# Altium PCB mini.PcbDoc
Units mm, origin at the board's own origin, x right, y up, seen from the top; angles counter-clockwise.
Board outline 46.48 x 38.61 mm, 2 copper layers (Top Layer, Bottom Layer); 40 components, 46 nets, 179 pads, 24 vias.
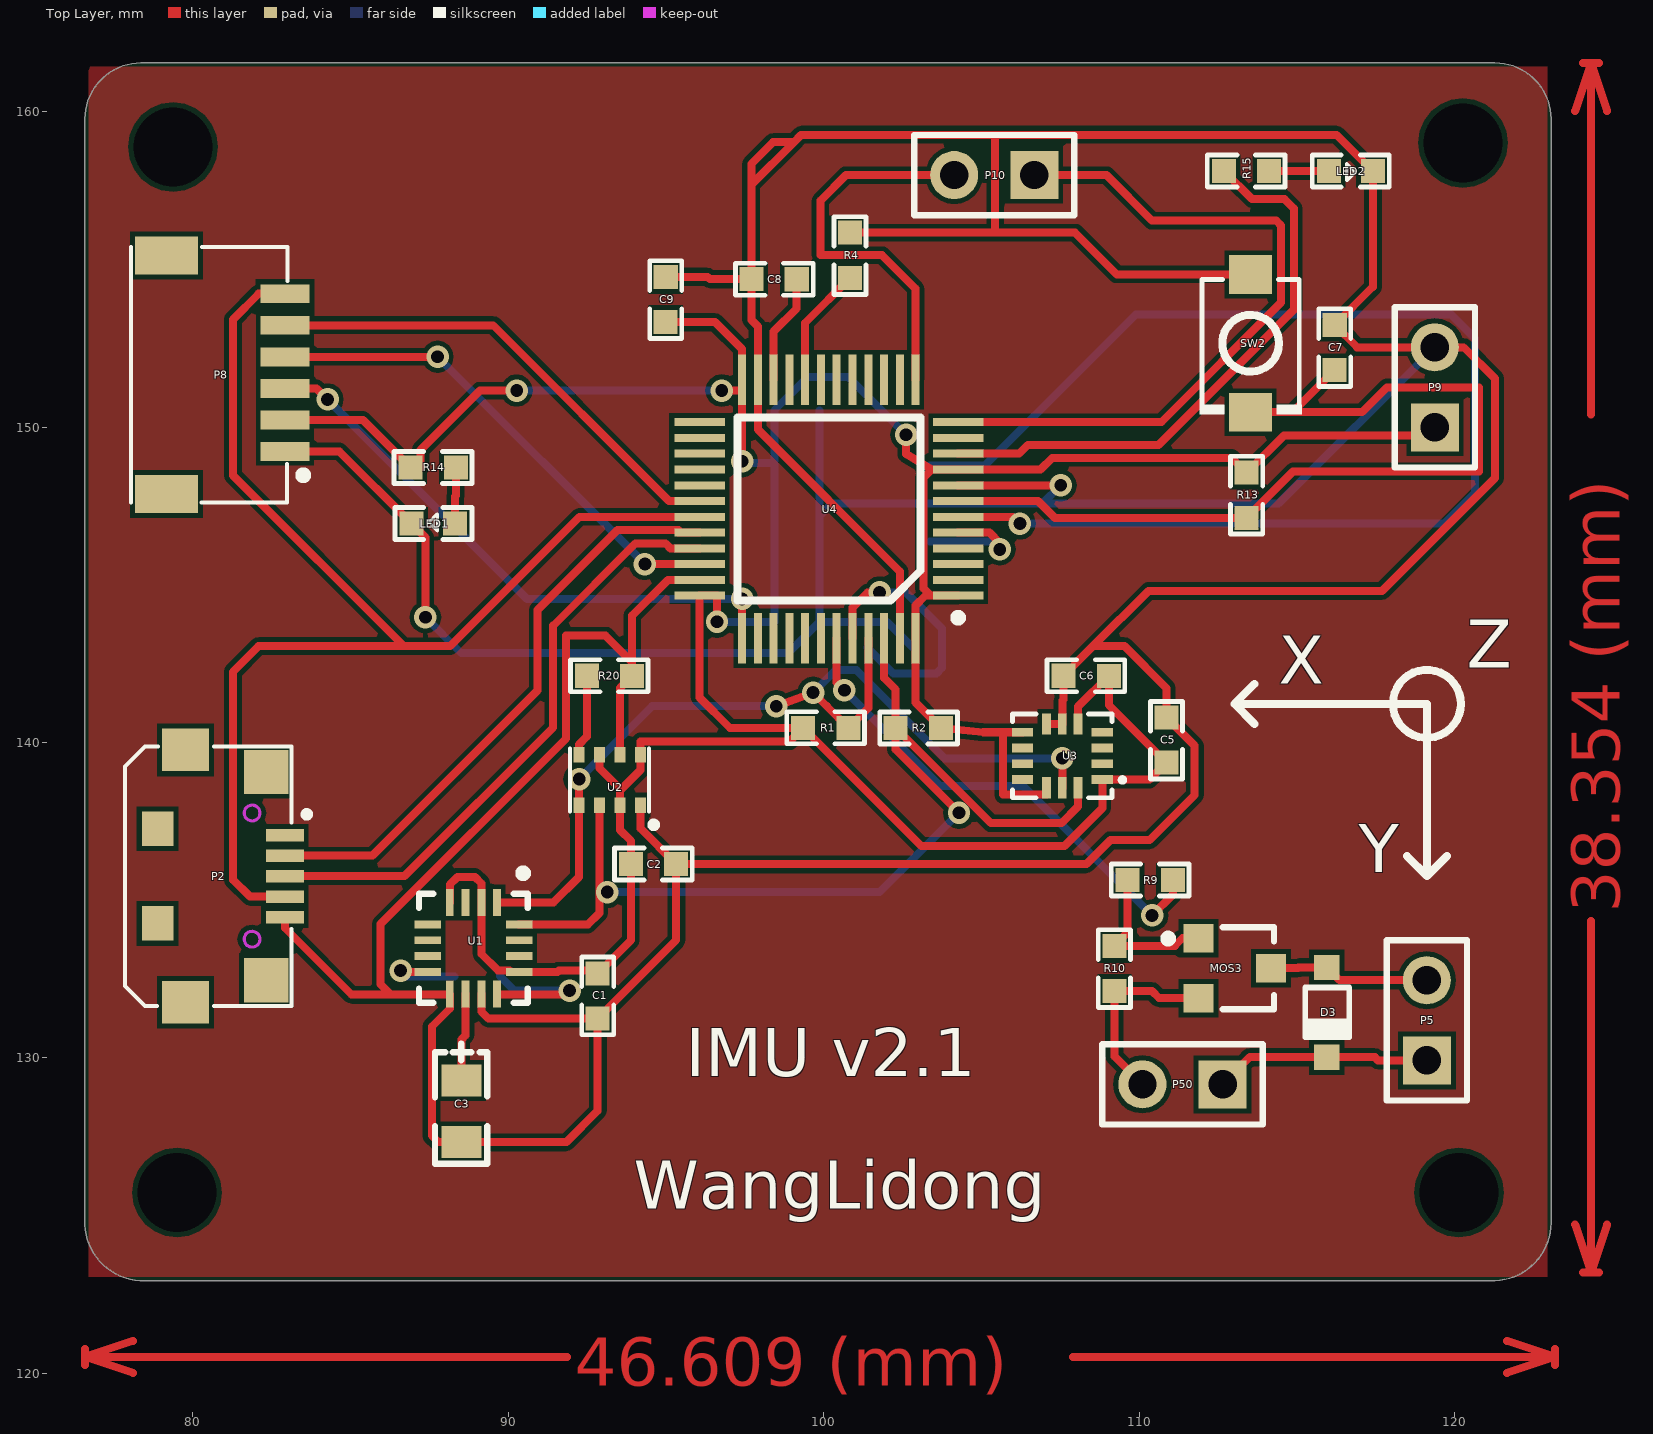
[diagram p0: Top Layer view]
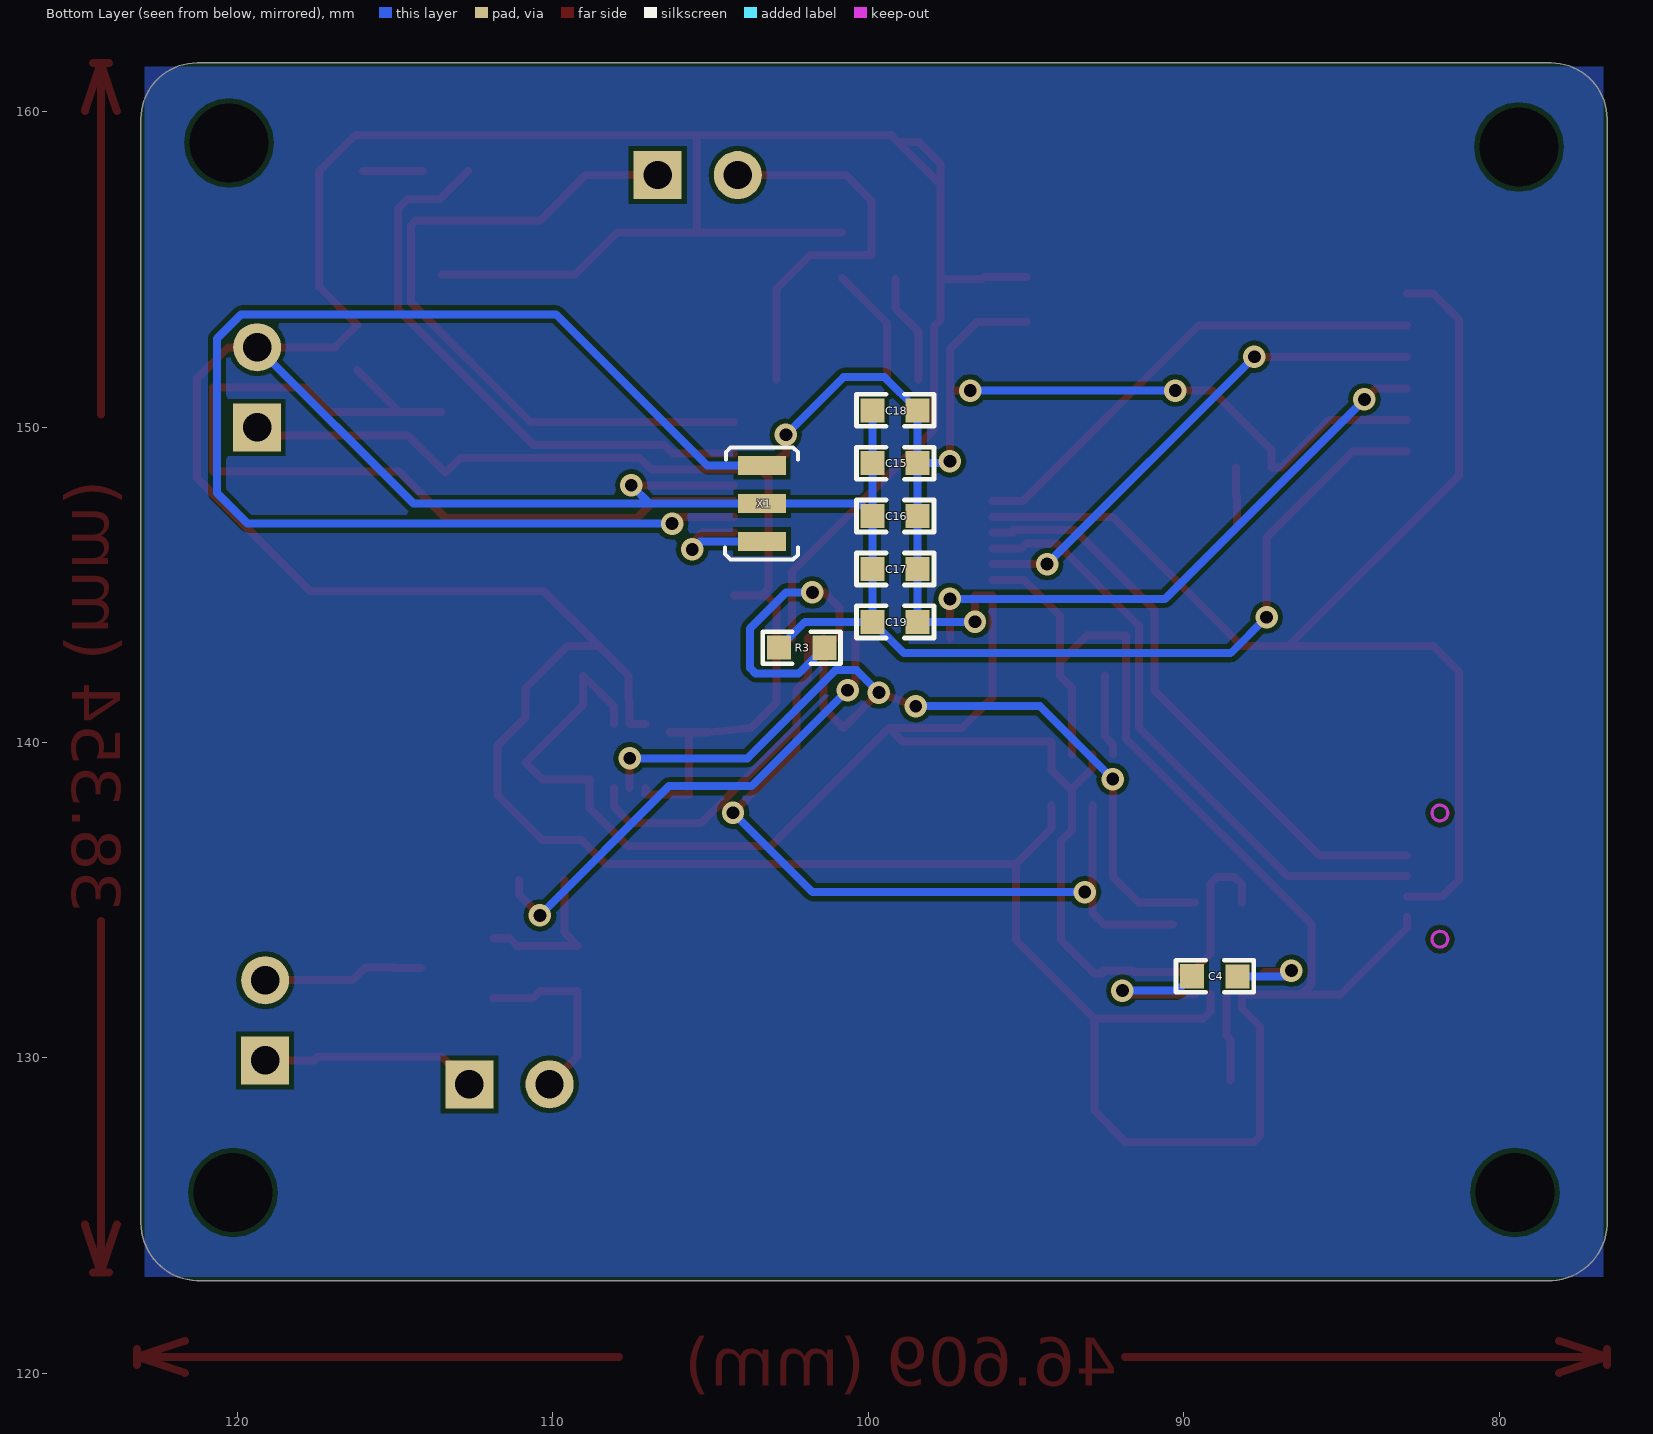
[diagram p1: Bottom Layer view, seen from below]

## Layer stack, top to bottom
Top Solder: solder mask 0.0102, Solder Resist, Dk 3.5
Top Layer: signal copper 0.0356
Dielectric 1: dielectric 0.32, FR-4, Dk 4.8
Bottom Layer: signal copper 0.0356
Bottom Solder: solder mask 0.0102, Solder Resist, Dk 3.5

## Board outline
76.581,124.714 76.581,159.766 cw(c78.359,159.766) 78.359,161.544 cw(c78.359,161.417) 78.36,161.544 121.285,161.544 cw(c121.285,159.766) 123.063,159.766 cw(c122.936,159.766) 123.063,159.765 123.063,124.843 cw(c121.221,124.778) 123.065,124.778 cw(c121.221,124.778) 121.29,122.936 cw(c121.285,123.063) 121.285,122.936 78.488,122.936 cw(c78.423,124.777) 76.581,124.709 cw(c76.708,124.714)

## Design rules (kind name [scope] priority, off if disabled: settings)
Clearance [All] p1: gap=0.152 ignorepadtopadclearanceinfootprint=FALSE except(0: Arc-Hole Track-Hole SMDPad-Hole THPad-Hole Via-Hole Fill-Hole Poly-Hole Region-Hole Text-Hole)
HoleSize [All] p1: absolutevalues=TRUE maxlimit=6.3 minlimit=0.2 maxpercent=80.000 minpercent=20.000
PolygonConnect [All] p1: connectstyle=Relief reliefconductorwidth=0.254 reliefentries=4 polygonreliefangle="90 Angle" airgapwidth=0.254
RoutingVias [All] p1: holewidth=0.406 width=0.711 viastyle="Through Hole" minholewidth=0.305 minwidth=0.635 maxholewidth=0.61 maxwidth=1.016
SolderMaskExpansion [All] p1: expansion=0.152
Width power [All] p1: maxlimit=2.54 minlimit=0.254 preferedwidth=0.254
Width [All] p2: maxlimit=2.54 minlimit=0.254 preferedwidth=0.254
29 further rules are at their usual default settings.

## Components (designator, comment, footprint, x,y, rotation, side; value= is the part's Value field where it differs from the comment)
C1 "0.1UF" 0603P 92.837,131.953 r90 top
C2 "10uF" 0603P 94.615,136.144 r180 top
C3 "4.7UF" "C0805 钽电容" 88.519,129.286 r270 top
C4 "0.22UF" 0603P 89.027,132.588 r180 bottom
C5 "100nF" 0603P 110.871,140.081 r270 top
C6 "100nF" 0603P 108.331,142.113 r180 top
C7 "104" 0603P 116.205,152.527 r270 top
C8 "10uF" 0603P 98.425,154.686 r0 top
C9 "104" 0603P 94.996,154.051 r270 top
C15 "104" 0603P 99.162,148.854 r180 bottom
C16 "104" 0603P 99.162,147.178 r180 bottom
C17 "104" 0603P 99.162,145.501 r180 bottom
C18 "103" 0603P 99.162,150.531 r180 bottom
C19 "10uF" 0603P 99.162,143.825 r180 bottom
D3 "BAT54WS" SOD-323 115.951,131.445 r90 top
LED1 "BLUE" 0603 87.63,146.939 r180 top
LED2 "BLUE" 0603 116.713,158.115 r0 top
MOS3 "SI2302" SO-G3/C2.5 113.03,132.842 r270 top
P2 "MICRO-USB" MICRO_USB5P_SOP 82.931,135.763 r90 top
P5 "Header 2" HDR1X2 119.126,129.921 r90 top
P8 "HEAD6" SH1.0-6P 82.931,149.225 r90 top
P9 "Header 2" HDR1X2 119.38,149.987 r90 top
P10 "Header 2" HDR1X2 106.68,157.988 r180 top
P50 "Header 2" HDR1X2 112.649,129.159 r180 top
R1 "2.2K" 0603P 100.076,140.462 r180 top
R2 "2.2K" 0603P 102.997,140.462 r0 top
R3 "10K" 0603P 102.108,143.002 r0 bottom
R4 "100K" 0603P 100.838,155.448 r270 top
R9 "100R" 0603P 110.363,135.636 r180 top
R10 "10K" 0603P 109.22,132.842 r270 top
R13 "100K" 0603P 113.411,147.828 r90 top
R14 "3.5k" 0603P 87.63,148.717 r180 top
R15 "2k" 0603P 113.411,158.115 r180 top
R20 "100K" 0603P 93.218,142.113 r180 top
SW2 "SW3_4" SW3_4 113.538,152.654 r270 top
U1 "HMC3883L" QFN-16PIN 88.9,133.477 r270 top
U2 "BMP280" LGA-8 93.218,138.811 r270 top
U3 "QMI8658" 14pinLGA 107.569,139.573 r180 top
U4 "STM32F103C8" mTQFP48 104.267,144.653 r180 top
X1 "8MHz" XTAL3215 103.378,147.574 r90 bottom

## Footprints (in the part's own frame and the unit in brackets; to place one, negate y for a bottom-side part, rotate by r counter-clockwise, add the part's x,y. Pads: shape width x height; smd on the part's side, far side on the other; paste and mask are expansions set on the pad)
14pinLGA [mm]
  rect 0.675x0.28 smd paste+0 mask+0.051: 1(-1.262,0.75) 2(-1.262,0.25) 3(-1.262,-0.25) 4(-1.262,-0.75) 8(1.262,-0.75) 9(1.262,-0.25) 10(1.262,0.25) 11(1.262,0.75)
  rect 0.28x0.675 smd paste+0 mask+0.051: 5(-0.5,-1.012) 6(0,-1.012) 7(0.5,-1.012) 12(0.5,1.012) 13(0,1.012) 14(-0.5,1.012)
  silkscreen extent -1.98,-1.33 1.58,1.33
0603 [mil]
  rect 30x30 smd: 1(-27,0) 2(27.5,-0.06)
  silkscreen extent -48,-20 48,20
0603P [mil]
  rect 30x30 smd: 1(-28,0) 2(28.5,-0.06)
  silkscreen extent -48,-20 49,20
"C0805 钽电容" [mil]
  rect 40x50 smd: 1(0,-0.06) 2(77,-0.06)
  silkscreen extent -46,-33 104,32
HDR1X2 [mil]
  rect 60x60 hole 35.43: 1(0,0)
  round 60 hole 35.43: 2(100,0)
  silkscreen extent -50,-50 150,50
LGA-8 [mm]
  rect 0.5x0.35 smd: 1(0.8,0.975) 2(0.8,0.325) 3(0.8,-0.325) 4(0.8,-0.975) 5(-0.8,-0.975) 6(-0.8,-0.325) 7(-0.8,0.325) 8(-0.8,0.975)
  silkscreen extent -1,-1.25 1.52,1.5
MICRO_USB5P_SOP [mm]
  rect 1.35x1.5 smd: 0(-4,3.16) 0(4,3.16)
  rect 1.4x1.4 smd: 0(-3.3,0.6) 0(3.3,0.6)
  rect 1.1x1 smd: 0(-1.5,4.046) 0(1.5,4.046)
  rect 0.4x1.2 smd: 1(1.3,0) 2(0.65,0) 3(0,0) 4(-0.65,0) 5(-1.3,0)
  Keep-Out Layer circle w0.1: c-2,1.05 r0.25
  Keep-Out Layer circle w0.1: c2,1.05 r0.25
  silkscreen extent -4.11,-0.79 4.11,5.08
mTQFP48 [mm]
  rect 1.6x0.254 smd: 1(0,0) 2(0,-0.5) 3(0,-1) 4(0,-1.5) 5(0,-2) 6(0,-2.5) 7(0,-3) 8(0,-3.5) 9(0,-4) 10(0,-4.5) 11(0,-5) 12(0,-5.5) 25(8.2,-5.5) 26(8.2,-5) 27(8.2,-4.5) 28(8.2,-4) 29(8.2,-3.5) 30(8.2,-3) 31(8.2,-2.5) 32(8.2,-2) 33(8.2,-1.5) 34(8.2,-1) 35(8.2,-0.5) 36(8.2,0)
  rect 0.254x1.6 smd: 13(1.35,-6.85) 14(1.85,-6.85) 15(2.35,-6.85) 16(2.85,-6.85) 17(3.35,-6.85) 18(3.85,-6.85) 19(4.35,-6.85) 20(4.85,-6.85) 21(5.35,-6.85) 22(5.85,-6.85) 23(6.35,-6.85) 24(6.85,-6.85) 37(6.85,1.35) 38(6.35,1.35) 39(5.85,1.35) 40(5.35,1.35) 41(4.85,1.35) 42(4.35,1.35) 43(3.85,1.35) 44(3.35,1.35) 45(2.85,1.35) 46(2.35,1.35) 47(1.85,1.35) 48(1.35,1.35)
  silkscreen extent -0.12,-5.65 7,0.82
QFN-16PIN [mm] "QFN, 16-Leads, Body 3.00x3.00mm, Pitch 0.50mm, IPC Medium Density"
  rect 0.85x0.25 smd: 1(-1.45,0.75) 2(-1.45,0.25) 3(-1.45,-0.25) 4(-1.45,-0.75) 9(1.45,-0.75) 10(1.45,-0.25) 11(1.45,0.25) 12(1.45,0.75)
  rect 0.25x0.85 smd: 5(-0.75,-1.45) 6(-0.25,-1.45) 7(0.25,-1.45) 8(0.75,-1.45) 13(0.75,1.45) 14(0.25,1.45) 15(-0.25,1.45) 16(-0.75,1.45)
  silkscreen extent -2.5,-1.73 1.73,1.73, body extent -1.58,-1.58 1.58,1.58, height 1
SH1.0-6P [mm]
  rect 0.6x1.55 smd: 1(0,0) 2(1,0) 3(2,0) 4(3,0) 5(4,0) 6(5,0)
  rect 1.2x2 smd: A(-1.346,3.759) B(6.21,3.759)
  silkscreen extent -1.63,-0.7 6.48,4.89
SO-G3/C2.5 [mm]
  rect 0.9x0.95 smd: 1(-0.95,-1.148) 2(0.95,-1.148) 3(0,1.148)
  silkscreen extent -1.3,-2.23 1.3,1.25
SOD-323 [mm]
  rect 0.8x0.8 smd: 1(1.422,0) 2(-1.422,0)
  silkscreen extent -0.79,-0.74 0.79,0.69
SW3_4 [mm]
  rect 1.23x1.36 smd paste+0 mask+0.051: 1(-2.185,0) 2(2.185,0)
  silkscreen extent -2.03,-1.62 2.25,1.62
XTAL3215 [mm]
  rect 0.6x1.524 smd: 1(-1.2,0) 2(0,0) 3(1.2,0)
  silkscreen extent -1.78,-1.14 1.78,1.17

## Part data
C1 C2 C4 C5 C6 C7 C8 C9 C15 C16 C17 C18 C19: library part C
C3: library part CAP
D3: library part BAT54, "单肖特基二极管"
LED1 LED2: library part LED
MOS3: library part MOS-N, "AP2306"
P2: library part USB5
P5 P9 P10 P50: "Header, 2-Pin"
R1 R2 R3 R4 R9 R10 R13 R14 R15 R20: library part R
SW2: library part SW_3_4
U1: library part HMC5883L
U4: library part STM32F103C6
X1: library part XTAL-3215

## Free pads (board coordinates)
  round 1.524 hole 2.5: 0(79.375,158.877) 0(79.502,125.73) 0(120.142,125.73) 0(120.269,159.004)

## Via types
v1: diameter 0.711, hole 0.406, Top Layer to Bottom Layer, 24 vias

## Nets (pads, with @x,y where several pads share a name; then routed paths per layer and width w, separated by ;. In a path a pad name is that pad's centre, name@x,y a point inside that pad or via, vN(x,y) a via of type N, cw(c..) or ccw(c..) an arc to the next point about the centre after c; other vN are vias at no path point)
DEV_SCK: U4.41
DEV_SDA: U4.40
GND: C1.1 C2.1 C3.2 C5.1 C6.2 C7.1 C8.1 C9.1 C15.1 C16.1 C17.1 C18.1 C19.1 LED1.2 LED2.2 P2.5 P8.1 P9.2 R3.2 R4.1 R20.1 SW2.1 U1.9 U1.11 U2.1 U2.7 U3.6 U3.7 U4.8 U4.23 U4.35 U4.47 X1.2 | length 228.5
  Top Layer w0.254: P2.5 82.931,134.112 85.039,132.004 86.284,132.004 ; P8.1 84.647,149.225 LED1.2 87.376,146.496 v1(87.376,143.967) ; U1.9 U1.9@88.15,132.004 ; U1.11 89.15,131.47 89.379,131.242 C1.1 ; U2.7 93.543,141.727 R20.1 93.929,142.545 ; U2.1 94.193,137.277 C2.1 ; C9.1 96.317,154.762 96.393,154.686 C8.1 ; U4.35 95.064,145.153 93.929,144.018 93.929,142.545 ; R4.1 107.975,156.159 109.296,154.839 SW2.1 ; U4.47 102.417,145.418 97.917,149.918 U4.23 97.917,153.187 97.714,153.391 C8.1 ; U4.8 v1(107.518,148.153) ; 105.435,156.159 105.435,159.258 ; U3.7 U3.6 107.569,141.326 107.607,141.364 C6.2 108.545,143.053 ; 86.284,132.004 85.954,132.334 85.954,134.239 91.834,140.119 91.834,143.383 93.091,143.383 93.929,142.545 ; 86.284,132.004 U1.9@88.15,132.004 ; U1.9@88.15,132.004 88.15,131.559 87.579,130.988 87.579,127.533 87.782,127.33 C3.2 91.846,127.33 92.837,128.321 C1.1 ; C1.1 95.326,133.731 C2.1 ; C2.1 108.331,136.144 109.093,136.906 110.338,136.906 111.76,138.328 111.76,139.903 C5.1 110.871,141.718 109.536,143.053 108.545,143.053 ; C8.1 97.714,157.683 ; 97.714,157.683 99.06,159.029 ; 97.714,157.683 97.714,158.344 98.4,159.029 99.06,159.029 ; 99.06,159.029 99.289,159.258 116.267,159.258 LED2.2 117.411,154.445 C7.1 116.916,152.527 P9.2 120.294,152.527 121.285,151.536 121.285,148.387 117.704,144.805 110.298,144.805 108.545,143.053
  Bottom Layer w0.254: v1(87.376,143.967) 88.514,142.829 98.877,142.829 C19.1 ; C18.1 C15.1 C16.1 ; R3.2 102.011,143.825 C19.1 ; v1(107.518,148.153) 106.939,147.574 ; P9.2 114.427,147.574 106.939,147.574 ; C19.1 C17.1 C16.1 ; C16.1 100.269,147.574 X1.2 106.939,147.574
IMU_SCL: R1.1 U1.1 U2.4 U3.13 U4.45 | length 29.5
  Top Layer w0.254: U1.1 89.65,134.925 91.43,134.925 92.243,135.738 U2.4 92.243,138.827 v1(92.253,138.836) ; v1(98.501,141.148) v1(99.67,141.58) 100.101,141.148 R1.1 101.417,141.092 U4.45 ; U3.13 v1(107.569,139.497)
  Bottom Layer w0.254: v1(92.253,138.836) 94.564,141.148 v1(98.501,141.148) ; v1(99.67,141.58) 100.381,142.291 101.041,142.291 103.835,139.497 v1(107.569,139.497)
IMU_SDA: R2.1 U1.16 U2.3 U3.14 U4.46 | length 33
  Top Layer w0.254: U1.16 92.525,134.227 92.893,134.595 v1@92.893,135.504 ; U2.3 v1@92.893,135.504 ; v1(93.142,135.255) v1@92.893,135.504 ; U4.46 101.917,142.05 102.286,141.681 R2.1 ; v1(104.292,137.77) 102.286,139.776 R2.1 ; U3.14 108.069,137.965 107.544,137.439 105.308,137.439 R2.1
  Bottom Layer w0.254: v1(93.142,135.255) 101.778,135.255 v1(104.292,137.77)
LED_status: R15.2 U4.10 | length 18.5
  Top Layer w0.254: U4.10 106.199,149.153 106.474,149.428 110.617,149.428 114.91,153.721 114.91,156.921 114.605,157.226 113.578,157.226 R15.2
MOTOR1: R9.1 U4.43 | length 15.8
  Top Layer w0.254: U4.43 100.417,141.899 v1(100.66,141.656) ; v1(110.414,134.518) 111.074,135.179 R9.1
  Bottom Layer w0.254: v1(100.66,141.656) 103.701,138.615 106.318,138.615 v1(110.414,134.518)
MOTOR2: U4.42
MOTOR3: U4.21
MOTOR4: U4.11
NetC3_1: C3.1 U1.10 | length 2.8
  Top Layer w0.254: C3.1 88.517,130.581 88.65,130.714 U1.10
NetC4_1: C4.1 U1.12 | length 4.8
  Top Layer w0.254: U1.12 89.65,132.004 91.821,132.004 v1(91.948,132.131)
  Bottom Layer w0.254: C4.1 90.195,132.131 v1(91.948,132.131)
NetC4_2: C4.2 U1.8 | length 2.7
  Top Layer w0.254: v1(86.589,132.766) 86.627,132.727 U1.8
  Bottom Layer w0.254: v1(86.589,132.766) 86.768,132.586 C4.2
NetC7_2: C7.2 R13.1 SW2.2 U4.7 | length 29.5
  Top Layer w0.254: U4.7 106.798,147.653 107.334,147.117 R13.1 114.884,148.59 120.777,148.59 120.777,151.257 117.856,151.257 117.068,150.469 114.869,150.469 ; SW2.2 114.869,150.469 ; C7.2 114.869,150.469
NetC8_2: C8.2 U4.22 | length 3.5
  Top Layer w0.254: U4.22 98.417,153.027 99.149,153.759 C8.2
NetD3_1: D3.1 MOS3.3 P5.2 | length 5.1
  Top Layer w0.254: MOS3.3 115.037,132.842 115.062,132.867 D3.1 116.357,132.461 P5.2
NetD3_2: D3.2 P5.1 P50.1 | length 6.9
  Top Layer w0.254: P50.1 113.513,130.023 D3.2 117.475,130.023 117.577,129.921 P5.1
NetLED1_1: LED1.1 R14.1 | length 1.8
  Top Layer w0.254: LED1.1 88.316,147.803 88.341,147.828 R14.1
NetLED2_1: LED2.1 R15.1 | length 1.9
  Top Layer w0.254: R15.1 LED2.1
NetMOS3_1: MOS3.1 R9.2 R10.1 | length 5
  Top Layer w0.254: R9.2 109.639,133.972 R10.1 111.134,133.553 111.373,133.792 MOS3.1
NetMOS3_2: MOS3.2 P50.2 R10.2 | length 6.1
  Top Layer w0.254: P50.2 109.218,130.05 R10.2 110.414,132.118 110.64,131.892 MOS3.2
NetP2_2: P2.2 U4.32 | length 19
  Top Layer w0.254: P2.2 85.7,136.413 90.932,141.645 90.932,144.196 93.467,146.731 95.394,146.731 95.394,146.653 U4.32
NetP2_3: P2.3 U4.33 | length 19.5
  Top Layer w0.254: P2.3 86.716,135.763 91.427,140.475 91.427,143.701 94.031,146.304 94.996,146.304 95.147,146.153 U4.33
NetR3_1: R3.1 U4.44 | length 8.5
  Top Layer w0.254: U4.44 100.917,144.272 101.4,144.755 v1(101.778,144.755)
  Bottom Layer w0.254: R3.1 102.21,142.189 103.581,142.189 103.759,142.367 103.759,143.612 102.616,144.755 v1(101.778,144.755)
NetR4_2: R4.2 U4.20 | length 3.8
  Top Layer w0.254: U4.20 99.417,153.305 R4.2
NetR20_2: R20.2 U2.5 | length 2.6
  Top Layer w0.254: U2.5 92.243,139.933 92.494,140.184 R20.2
NetU4_5: U4.5 X1.1 | length 4
  Top Layer w0.254: U4.5 105.258,146.653 105.588,146.323 v1(105.588,146.121)
  Bottom Layer w0.254: X1.1 105.335,146.374 v1(105.588,146.121)
NetU4_6: U4.6 X1.3 | length 41.3
  Top Layer w0.254: U4.6 106.009,147.153 v1(106.223,146.939)
  Bottom Layer w0.254: X1.3 105.105,148.774 109.9,153.568 119.888,153.568 120.65,152.806 120.65,147.904 119.685,146.939 v1(106.223,146.939)
NRF_CE: U4.25
NRF_CSN: U4.29
NRF_IRQ: U4.2
NRF_MISO: U4.27
NRF_MOSI: U4.28
NRF_SCK: U4.26
RX1: P2.4 P8.6 U4.31 | length 39.9
  Top Layer w0.254: P2.4 81.813,135.113 81.28,135.646 81.28,142.24 82.093,143.053 86.69,143.053 ; P8.6 82.093,154.225 81.28,153.412 81.28,148.463 86.69,143.053 ; U4.31 92.264,147.153 88.163,143.053 86.69,143.053
RX2: P10.2 U4.13 | length 12.6
  Top Layer w0.254: U4.13 102.917,154.385 101.854,155.448 99.898,155.448 99.898,157.175 100.711,157.988 P10.2
SPI_CE: U4.14
SPI_MISO: U4.16
SPI_MOSI: U4.17
SPI_SCK: U4.15
STM_SWCLK: P8.3 U4.37 | length 18.5
  Top Layer w0.254: P8.3 83.928,151.225 v1(84.277,150.876) ; U4.37 v1(97.417,144.551)
  Bottom Layer w0.254: v1(84.277,150.876) 90.602,144.551 v1(97.417,144.551)
STM_SWIO: P8.4 U4.34 | length 15.9
  Top Layer w0.254: P8.4 v1(87.764,152.225) ; v1(94.336,145.653) U4.34
  Bottom Layer w0.254: v1(87.764,152.225) v1(94.336,145.653)
TX1: P8.5 U4.30 | length 15.4
  Top Layer w0.254: P8.5 89.526,153.225 95.098,147.653 U4.30
TX2: P10.1 U4.12 | length 22.7
  Top Layer w0.254: U4.12 110.707,150.153 114.503,153.949 114.503,156.388 114.351,156.54 110.414,156.54 108.966,157.988 P10.1
VCC: C1.2 C2.2 C5.2 C6.1 C9.2 C15.2 C16.2 C17.2 C18.2 C19.2 P8.2 P9.1 R1.2 R2.2 R13.2 R14.2 U1.2 U1.4 U1.13 U2.2 U2.6 U2.8 U3.1 U3.5 U3.8 U3.12 U4.1 U4.9 U4.24 U4.36 U4.48 | length 123.7
  Top Layer w0.254: P8.2 85.4,150.225 R14.2 87.224,148.719 87.224,149.276 89.103,151.155 v1(90.272,151.155) ; U1.4 88.15,135.496 88.392,135.738 88.947,135.738 89.15,135.534 U1.2 89.15,133.299 89.683,132.766 90.043,132.766 90.043,132.727 U1.13 91.567,132.727 91.606,132.766 92.585,132.766 92.585,132.677 C1.2 93.891,133.729 C2.2 93.891,136.881 93.543,137.229 U2.2 93.543,138.481 ; U2.6 92.893,139.182 93.543,138.532 93.543,138.481 ; C9.2 96.558,153.327 97.417,152.468 U4.24 U4.24@97.417,151.155 ; v1(96.622,143.823) 96.622,144.653 U4.36 96.063,144.653 96.063,141.427 97.026,140.464 R1.2 ; v1(96.774,151.155) U4.24@97.417,151.155 ; v1(97.417,148.912) U4.24@97.417,151.155 ; v1(102.616,149.754) 102.616,149.149 103.429,148.653 ; U4.1 103.403,144.653 ; U3.8 105.689,140.323 ; U3.12 107.069,138.343 105.689,138.343 105.689,140.323 ; U3.5 108.069,141.14 C6.1 109.042,141.184 C5.2 110.335,138.823 U3.1@108.839,138.823 ; U3.1 U3.1@108.839,138.823 ; P9.1 119.126,149.733 114.594,149.733 R13.2 112.943,149.022 107.249,149.022 106.881,148.653 U4.9 103.429,148.653 ; 93.543,138.481 94.193,139.131 U2.8 94.193,140.03 98.919,140.03 R1.2 ; R1.2 103.098,136.718 107.635,136.718 108.839,137.922 U3.1@108.839,138.823 ; 103.403,144.653 103.175,144.882 103.175,148.399 103.429,148.653 ; 103.403,144.653 103.226,144.653 102.917,144.344 U4.48 102.917,141.264 R2.2 105.065,140.323 105.689,140.323
  Bottom Layer w0.254: v1(90.272,151.155) v1(96.774,151.155) ; v1(96.622,143.823) C19.2 C17.2 C16.2 C15.2 ; v1(97.417,148.912) 97.477,148.853 C15.2 ; v1(102.616,149.754) 100.783,151.587 99.496,151.587 C18.2 C15.2
VUSB: P2.1
pads on no net: P2.0 P8.A P8.B U1.3 U1.5 U1.6 U1.7 U1.14 U1.15 U3.2 U3.3 U3.4 U3.9 U3.10 U3.11 U4.3 U4.4 U4.18 U4.19 U4.38 U4.39
copper on no net: | length 67.8
  Top Layer w0.254: 76.581,120.269 76.581,120.777 ; 78.105,120.015 76.581,120.523 ; 78.105,121.031 76.581,120.523 ; 91.862,120.523 76.581,120.523 ; 107.909,120.523 123.19,120.523 ; 121.666,120.015 123.19,120.523 ; 121.666,121.031 123.19,120.523 ; 123.19,120.269 123.19,120.777 ; 123.825,124.714 124.333,123.19 ; 123.825,160.02 124.333,161.544 ; 124.079,123.19 124.587,123.19 ; 124.079,161.544 124.587,161.544 ; 124.333,134.343 124.333,123.19 ; 124.333,150.391 124.333,161.544 ; 124.841,124.714 124.333,123.19 ; 124.841,160.02 124.333,161.544

## Polygon pours and split planes (outlines as drawn)
no net on Top Layer "Top Layer-No Net" (solid, pour order 2): 76.581,161.417 122.936,161.417 122.936,123.063 76.708,123.063 76.708,161.29
no net on Bottom Layer "Bottom Layer-No Net" (solid, pour order 4): 76.708,161.417 122.936,161.417 122.936,123.063 76.708,123.063

## Other copper
Top Layer:
  text "38.354 (mm)" at 125.247,134.597 h1.52 r90
  text "46.609 (mm)" at 92.116,119.609 h1.52

## Silkscreen, mask and mechanical layers (free items; w line width, h text height)
Top Overlay:
  circle w0.254: c119.126,141.224 r1.078
  lines w0.254: 113.665,140.589 113.03,141.224 ; 113.665,141.859 113.03,141.224 ; 118.491,136.398 119.126,135.763 ; 119.761,136.398 119.126,135.763 ; 113.03,141.224 119.126,141.224 119.126,135.763
  text "Z" at 120.396,142.367 h1.52
  text "X" at 114.427,141.859 h1.52
  text "Y" at 116.967,135.89 h1.52
  text "IMU v2.1" at 95.631,129.413 h1.52
  text "WangLidong" at 93.98,125.222 h1.52
Mechanical 1:
  lines w0.254: 78.359,123.063 121.285,123.063 ccw(c121.221,124.778) 122.936,124.841 122.936,159.766 ccw(c121.285,159.766) 121.285,161.417 78.359,161.417 ccw(c78.359,159.766) 76.708,159.766 76.708,124.714 ccw(c78.423,124.777) 78.486,123.063